# Altium PCB 单片机频谱显示.PcbDoc
Units mil, origin at the board's own origin, x right, y up, seen from the top; angles counter-clockwise.
Board outline 3810.03 x 1490.03 mil, 4 copper layers (Top Layer, Internal Plane 1, Internal Plane 2, Bottom Layer); 12 components, 32 nets, 87 pads, 0 vias.
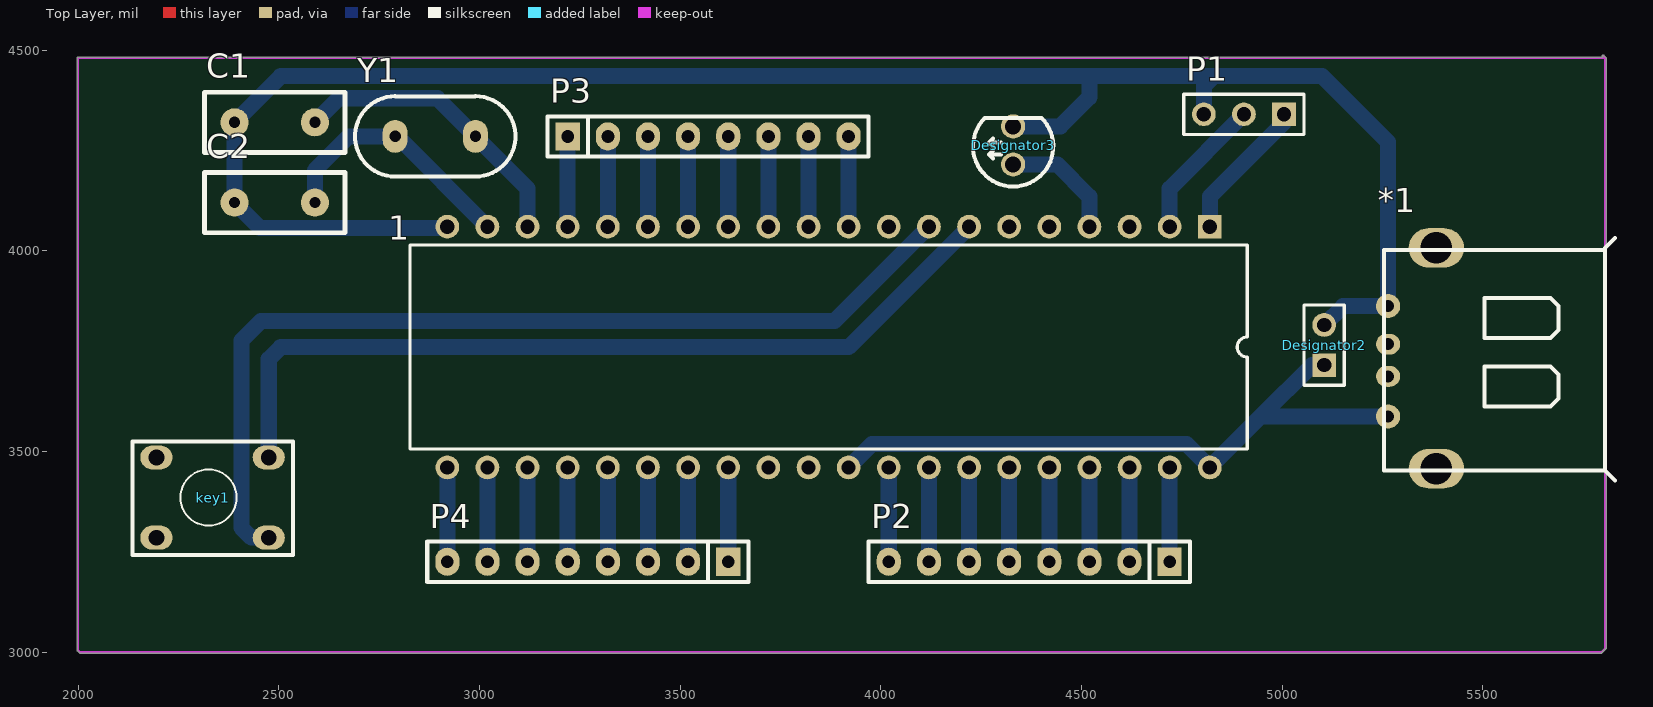
[diagram p0: Top Layer view]
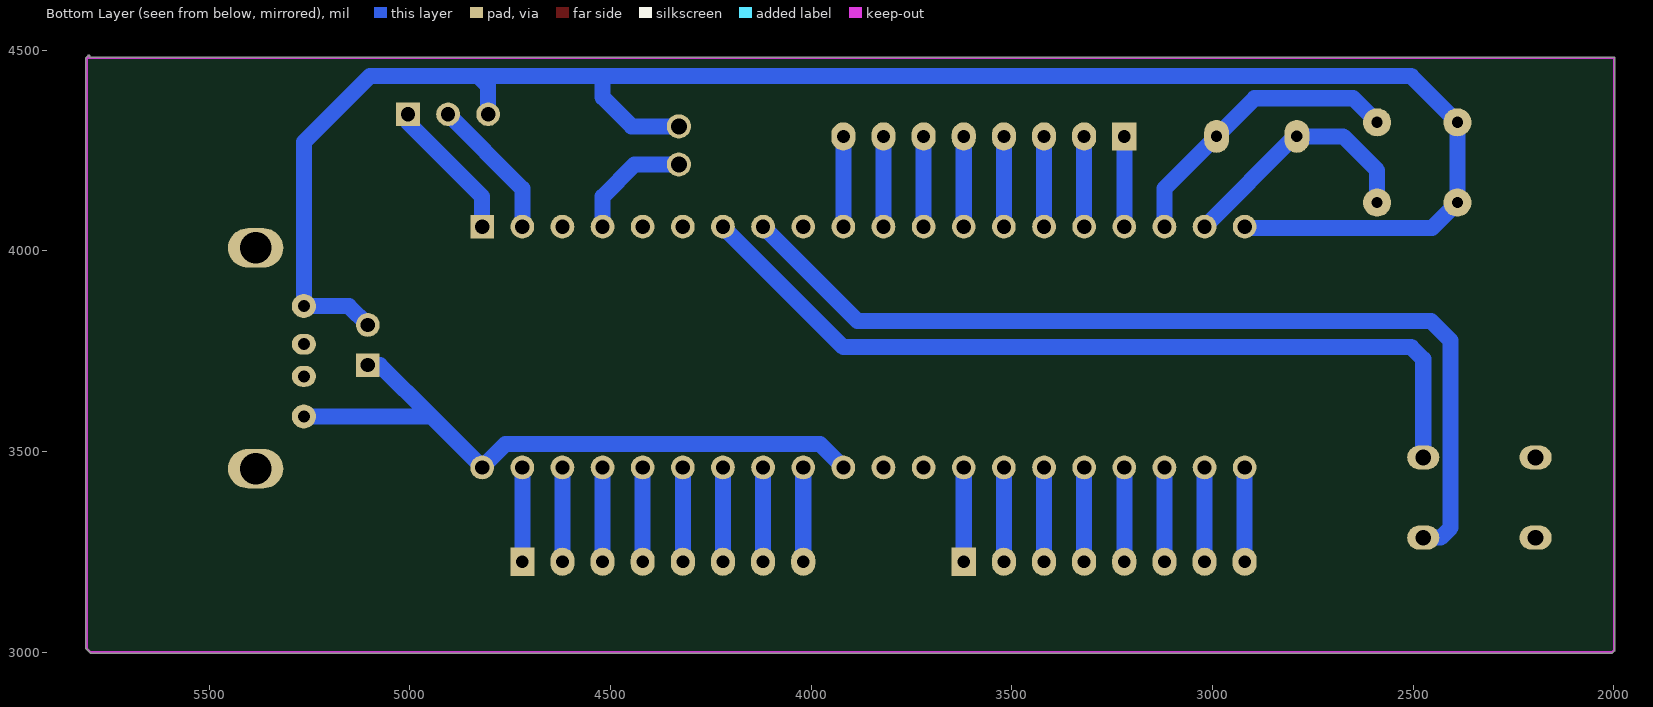
[diagram p1: Bottom Layer view, seen from below]
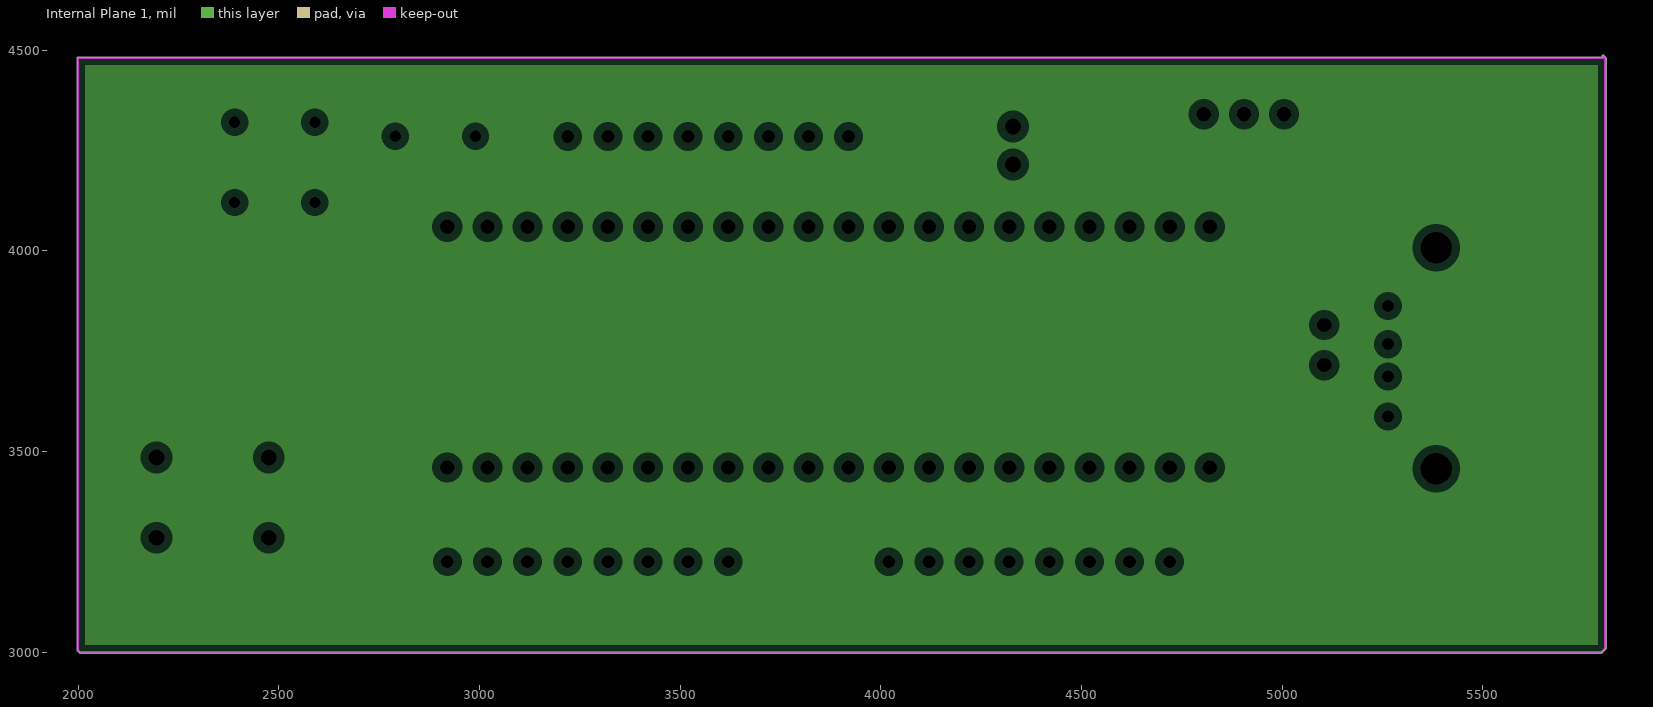
[diagram p2: Internal Plane 1, clearances drawn from the general rule]
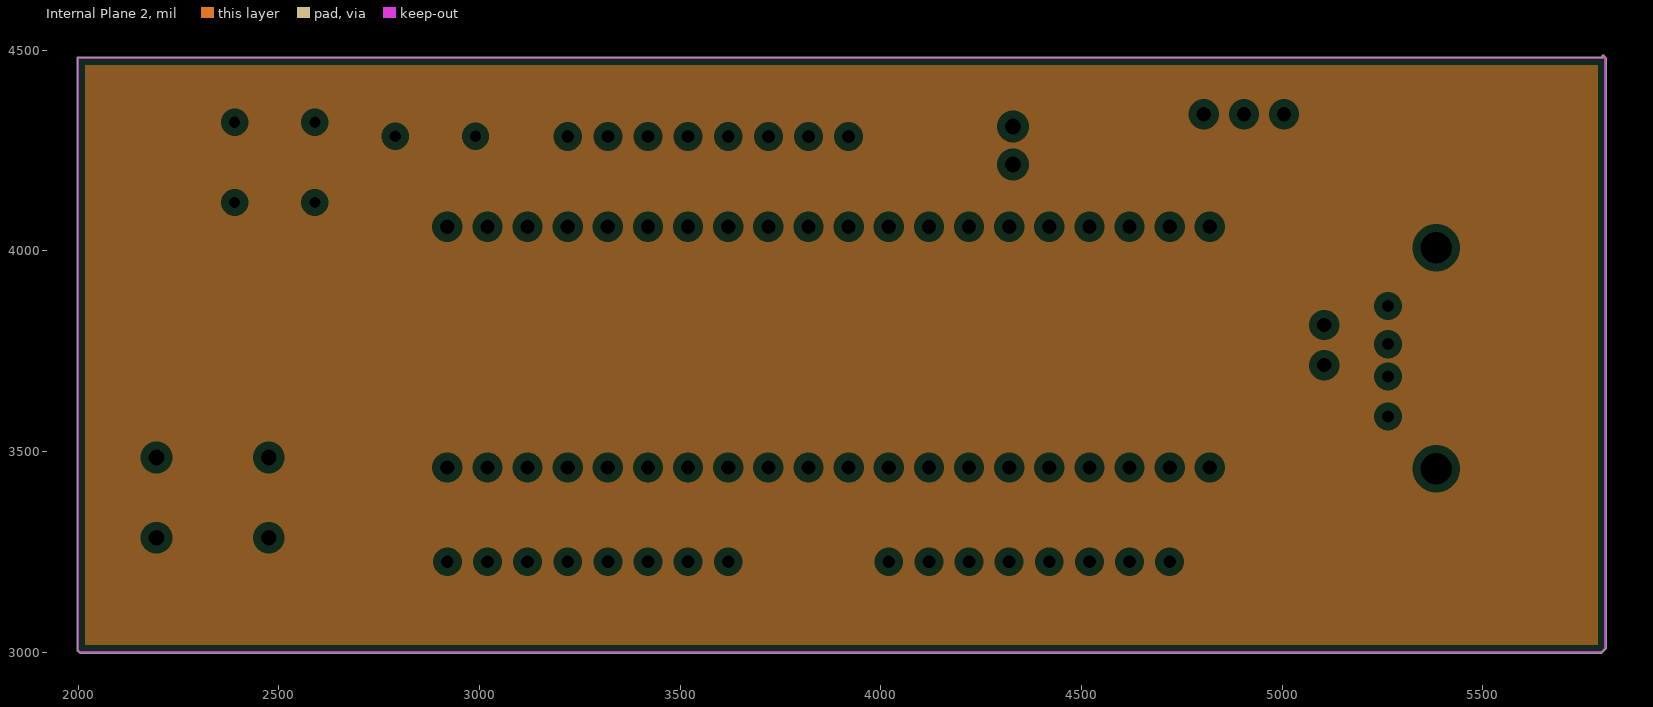
[diagram p3: Internal Plane 2, clearances drawn from the general rule]

## Layer stack, top to bottom
Top Layer: signal copper 1.4
Dielectric: dielectric 12.6, FR-4, Dk 4.8
Internal Plane 1: plane copper 1.4
Dielectric: dielectric 12.6, FR-4, Dk 4.8
Internal Plane 2: plane copper 1.4
Dielectric: dielectric 12.6, FR-4, Dk 4.8
Bottom Layer: signal copper 1.4

## Board outline
2003.22,2998.22 1998.22,3003.22 cw(c2000,3005) 1997.48,3005 1997.48,4480 cw(c2000,4480) 2000,4482.52 5798.93,4482.52 5798.22,4483.22 cw(c5800,4485) 5801.78,4486.78 5806.78,4481.78 cw(c5805,4480) 5807.52,4480 5807.52,3010 cw(c5805,3010) 5806.78,3008.22 5796.78,2998.22 cw(c5795,3000) 5795,2997.49 2005,2997.49 cw(c2005,3000)

## Design rules (kind name [scope] priority, off if disabled: settings)
Clearance [All] p1: gap=7.87
PlaneClearance [All] p1: clearance=20
PlaneConnect [All] p1: planeconnectstyle=Relief reliefexpansion=20 reliefentries=4 reliefconductorwidth=10 reliefairgap=10
PolygonConnect [All] p1: connectstyle=Relief reliefconductorwidth=10 reliefentries=4 polygonreliefangle="90 Angle" airgapwidth=10
RoutingLayers [All] p1: top layer_v5=FALSE bottom layer_v5=TRUE
RoutingVias [All] p1: holewidth=23.62 width=39.37 viastyle="Through Hole" minholewidth=28 minwidth=50 maxholewidth=28 maxwidth=50
SilkscreenOverComponentPads [All] p1: minsilkscreentomaskgap=10
SolderMaskExpansion [All] p1: expansion=4
Width [All] p1: maxlimit=100 minlimit=7.87 preferedwidth=40
24 further rules are at their usual default settings.

## Classes and differential pairs
component class 单片机频谱显示: 1 *1 C1 C2 key1 P1 P2 P3 P4 Y1

## Components (designator, comment, footprint, x,y, rotation, side; value= is the part's Value field where it differs from the comment)
1 "AT89S5X" DIP-40 3830,3780 r180 top
*1 "usb" USB 5550,3735 r0 top
C1 "CAP" RAD0.2 2490,4320 r0 top
C2 "CAP" RAD0.2 2490,4120 r0 top
Designator2 "Comment" HDR1X2 5105,3715 r90 top
Designator3 "Comment" LED 4330,4215 r90 top
key1 "KEY" KeyA 2515,3245 r180 top
P1 "INPUT" HDR1X3 5005,4340 r180 top
P2 "Header 8" SIP8 4720,3225 r180 top
P3 "Header 8" sip8 3220,4285 r0 top
P4 "Header 8" SIP8 3620,3225 r180 top
Y1 "XTAL" XTAL 2890,4285 r0 top

## Footprints (in the part's own frame and the unit in brackets; to place one, negate y for a bottom-side part, rotate by r counter-clockwise, add the part's x,y. Pads: shape width x height; smd on the part's side, far side on the other; paste and mask are expansions set on the pad)
DIP-40 [mm]
  rect 1.5x1.5 hole 0.9: 1(-25.146,-7.112)
  round 1.5 hole 0.9: 2(-22.606,-7.112) 3(-20.066,-7.112) 4(-17.526,-7.112) 5(-14.986,-7.112) 6(-12.446,-7.112) 7(-9.906,-7.112) 8(-7.366,-7.112) 9(-4.826,-7.112) 10(-2.286,-7.112) 11(0.254,-7.112) 12(2.794,-7.112) 13(5.334,-7.112) 14(7.874,-7.112) 15(10.414,-7.112) 16(12.954,-7.112) 17(15.494,-7.112) 18(18.034,-7.112) 19(20.574,-7.112) 20(23.114,-7.112) 21(23.114,8.128) 22(20.574,8.128) 23(18.034,8.128) 24(15.494,8.128) 25(12.954,8.128) 26(10.414,8.128) 27(7.874,8.128) 28(5.334,8.128) 29(2.794,8.128) 30(0.254,8.128) 31(-2.286,8.128) 32(-4.826,8.128) 33(-7.366,8.128) 34(-9.906,8.128) 35(-12.446,8.128) 36(-14.986,8.128) 37(-17.526,8.128) 38(-20.066,8.128) 39(-22.606,8.128) 40(-25.146,8.128)
  silkscreen extent -27.52,-5.94 25.48,6.96
HDR1X2 [mm] "Connector; Header; 2 Position"
  rect 1.5x1.5 hole 0.9: +(0,0)
  round 1.5 hole 0.9: -(2.54,0)
  silkscreen extent -1.27,-1.27 3.81,1.27
HDR1X3 [mm]
  rect 1.5x1.5 hole 0.9: 1(0,0)
  round 1.5 hole 0.9: 2(2.54,0) 3(5.08,0)
  silkscreen extent -1.27,-1.27 6.35,1.27
KeyA [mil]
  oval 80x60 hole 39.37: 1(40,-40) 2(40,-240) 3(320,-240) 4(320,-40)
  silkscreen extent -20,-280 380,3
LED [mil]
  round 60 hole 40: 1(0,0) 2(95,0)
  silkscreen extent -55,-100 116,100
RAD0.2 [mil]
  round 70 hole 28: 1(-100,0) 2(100,0)
  silkscreen extent -175,-75 175,75
SIP8 [mil]
  rect 60x70 hole 32: 1(0,0)
  oval 60x70 hole 32: 2(100,0) 3(200,0) 4(300,0) 5(400,0) 6(500,0) 7(600,0) 8(700,0)
  silkscreen extent -50,-50 750,50, body extent -50,-50 750,50, height 336
sip8 [mil]
  rect 60x70 hole 32: 1(0,0)
  oval 60x70 hole 32: 2(100,0) 3(200,0) 4(300,0) 5(400,0) 6(500,0) 7(600,0) 8(700,0)
  silkscreen extent -50,-50 750,50, body extent -50,-50 750,50, height 336
USB [mil]
  round 60 hole 30: +(-285.63,-147.91) -(-285.63,127.09)
  oval 60x52.13 hole 30: D1(-285.63,32.09) D2(-285.63,-47.91)
  oval 137.79x98.42 hole 78.74: NP(-165.63,-277.91) NP(-165.63,272.09)
  silkscreen extent -296,-308 279,297
XTAL [mil]
  oval 62x82 hole 28: 1(-100,0) 2(100,0)
  silkscreen extent -200,-100 200,100

## Nets (pads, with @x,y where several pads share a name; then routed paths per layer and width w, separated by ;. In a path a pad name is that pad's centre, name@x,y a point inside that pad or via, vN(x,y) a via of type N, cw(c..) or ccw(c..) an arc to the next point about the centre after c; other vN are vias at no path point)
GND: 1.20 *1.- C1.1 C2.1 Designator2.- Designator3.2 P1.3 | length 4714.7
  Bottom Layer w40: 1.20 2917.13,4057.13 2452.87,4057.13 C2.1 C1.1 2505,4435 4525,4435 ; Designator3.2 4447.5,4310 4520,4382.5 4520,4430 4525,4435 ; P1.3 4805,4410 4830,4435 ; Designator2.- 5152.09,3862.09 *1.- 5264.37,4270.63 5100,4435 4830,4435 ; 4525,4435 4830,4435
Net1_1: 1.1 P1.1 | length 356.6
  Bottom Layer w40: 1.1 4820,4135 5005,4320 P1.1
Net1_2: 1.2 P1.2 | length 356.6
  Bottom Layer w40: 1.2 4720,4155 P1.2
Net1_7: 1.7 key1.2 | length 2126.7
  Bottom Layer w40: key1.2 2475,3730 2505,3760 3920,3760 1.7
Net1_8: 1.8 key1.1 | length 2375
  Bottom Layer w40: key1.1 2432,3285 2407,3310 2407,3776 2456,3825 3885,3825 1.8
Net1_10: 1.10 P3.8 | length 225
  Bottom Layer w40: 1.10 P3.8
Net1_11: 1.11 P3.7 | length 225
  Bottom Layer w40: 1.11 P3.7
Net1_12: 1.12 P3.6 | length 225
  Bottom Layer w40: 1.12 P3.6
Net1_13: 1.13 P3.5 | length 225
  Bottom Layer w40: 1.13 P3.5
Net1_14: 1.14 P3.4 | length 225
  Bottom Layer w40: 1.14 P3.4
Net1_15: 1.15 P3.3 | length 225
  Bottom Layer w40: 1.15 P3.3
Net1_16: 1.16 P3.2 | length 225
  Bottom Layer w40: 1.16 P3.2
Net1_17: 1.17 P3.1 | length 225
  Bottom Layer w40: 1.17 P3.1
Net1_18: 1.18 C1.2 Y1.2 | length 743.1
  Bottom Layer w40: C1.2 2650,4380 2895,4380 Y1.2 3120,4155 1.18
Net1_19: 1.19 C2.2 Y1.1 | length 638.4
  Bottom Layer w40: C2.2 2590,4200 2675,4285 Y1.1 2795,4285 1.19
Net1_21: 1.21 P4.8 | length 235
  Bottom Layer w40: P4.8 1.21
Net1_22: 1.22 P4.7 | length 235
  Bottom Layer w40: P4.7 1.22
Net1_23: 1.23 P4.6 | length 235
  Bottom Layer w40: P4.6 1.23
Net1_24: 1.24 P4.5 | length 235
  Bottom Layer w40: P4.5 1.24
Net1_25: 1.25 P4.4 | length 235
  Bottom Layer w40: P4.4 1.25
Net1_26: 1.26 P4.3 | length 235
  Bottom Layer w40: P4.3 1.26
Net1_27: 1.27 P4.2 | length 235
  Bottom Layer w40: P4.2 1.27
Net1_28: 1.28 P4.1 | length 235
  Bottom Layer w40: P4.1 1.28
Net1_32: 1.32 P2.8 | length 235
  Bottom Layer w40: P2.8 1.32
Net1_33: 1.33 P2.7 | length 235
  Bottom Layer w40: P2.7 1.33
Net1_34: 1.34 P2.6 | length 235
  Bottom Layer w40: P2.6 1.34
Net1_35: 1.35 P2.5 | length 235
  Bottom Layer w40: P2.5 1.35
Net1_36: 1.36 P2.4 | length 235
  Bottom Layer w40: P2.4 1.36
Net1_37: 1.37 P2.3 | length 235
  Bottom Layer w40: P2.3 1.37
Net1_38: 1.38 P2.2 | length 235
  Bottom Layer w40: P2.2 1.38
Net1_39: 1.39 P2.1 | length 235
  Bottom Layer w40: P2.1 1.39
VCC: 1.31 1.40 *1.+ Designator2.+ | length 1656
  Bottom Layer w40: 1.31 3978,3518 4762,3518 1.40 4947.09,3587.09 ; Designator2.+ 5075,3715 4947.09,3587.09 ; *1.+ 4947.09,3587.09
pads on no net: 1.3 1.4 1.5 1.6 1.9 1.29 1.30 *1.D1 *1.D2 *1.NP Designator3.1 key1.3 key1.4
copper on no net: | length 348.1
  Bottom Layer w40: 4330,4215 4411.85,4215 4440,4215 4520,4135 4520,4060 4520,4110

## Polygon pours and split planes (outlines as drawn)
no net on Internal Plane 1 (split plane): 5787.42,3017.58 2017.58,3017.58 2017.58,4462.42 5787.42,4462.42
no net on Internal Plane 2 (split plane): 5787.42,3017.58 2017.58,3017.58 2017.58,4462.42 5787.42,4462.42

## Keep-outs
Keep-Out Layer:
  lines w5: 2056.18,4480 5805,4480 ; 2075,4480 2000,4480 2000,3005 2005,3000 5795,3000 5805,3010 5805,3065 ; 5800,4485 5805,4480 ; 5805,3051.18 5805,4295 5805,4480